# EAGLE board RFM2Pi_v2.7 (EAGLE 7.0.0)
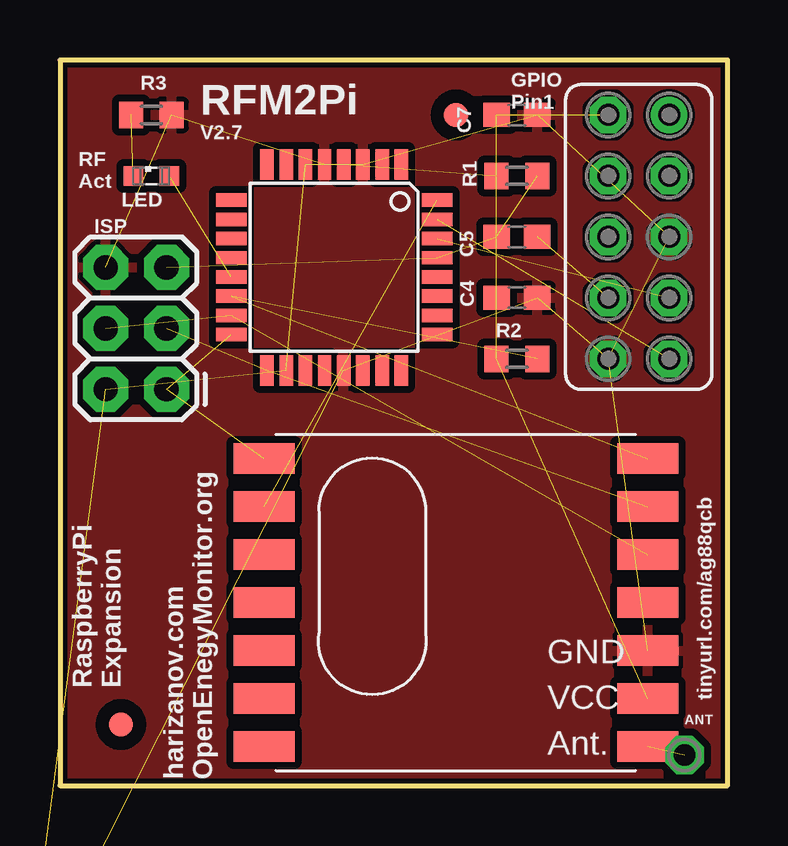
[diagram p0: board, top side]
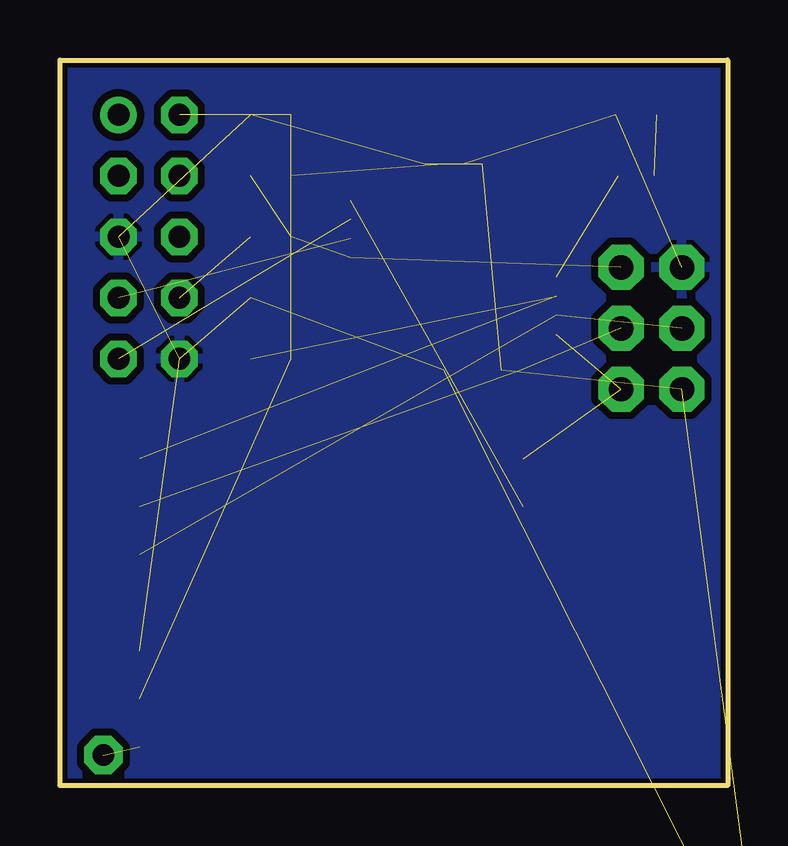
[diagram p1: board, bottom side, seen from below]

Size 27.84 x 30.23 mm. Coordinates in mm from the lower left corner, seen from the top.
Outline: 0,30.23 0,0 27.84,0 27.84,30.23 0,30.23
Copper layers (1*16): Top 0.035mm / dielectric 1.5mm / Bottom 0.035mm
Design rules "default": minimum track width 8mil, minimum drill 0.6mm, track to track 8mil, track to pad 8mil, pad to pad 8mil, via to via 8mil, smd to smd 8mil, copper to edge 8mil, drill to drill 8mil, minimum pad ring 12mil, minimum via ring 8mil, stop-mask expansion 4mil, vias tented up to drill 0mil, thermal gap 8mil
Net classes: 0 default: width 0.254 mm, drill 0.254 mm, clearance 0.254 mm; 1 power: width 0.305 mm, drill 0.305 mm, clearance 0.305 mm

## Footprints (pad centres in the part's own frame; a part is rotated, then mirrored left to right if it is on the bottom)
1,6/0,8 = drill 0.9 pad 1.6 octagon: 1 0,0
C0603 = smd 1.1 x 1: 1 -0.85,0; 2 0.85,0
2X3 = drill 1.016 pad 1.88 octagon: 1 0,0; 2 0,2.54; 3 2.54,0; 4 2.54,2.54; 5 5.08,0; 6 5.08,2.54
SML0603 = smd 0.8 x 0.8: A 0.75,0; C -0.75,0
R0603 = smd 1 x 1.1: 1 -0.85,0; 2 0.85,0
FE05-2 = drill 0.914: 1 -5.08,1.27 | drill 0.914 octagon: 2 -5.08,-1.27; 3 -2.54,1.27; 4 -2.54,-1.27; 5 0,1.27; 6 0,-1.27; 7 2.54,1.27; 8 2.54,-1.27; 9 5.08,1.27; 10 5.08,-1.27
RFM12B = smd 2.54 x 1.27: ANT 8,-6; FFS -8,2; GND 8,-2; IRQ -8,4; P$8 -8,0; P$9 -8,-2; P$10 -8,-4; P$12 -8,-6; P$16 8,0; SCK 8,4; SDI 8,2; SDO -8,6; SEL 8,6; VDD 8,-4
TQFP32-08 = smd 1.27 x 0.559: 1 -4.293,2.8; 2 -4.293,2; 3 -4.293,1.2; 4 -4.293,0.4; 5 -4.293,-0.4; 6 -4.293,-1.2; 7 -4.293,-2; 8 -4.293,-2.8; 17 4.293,-2.8; 18 4.293,-2; 19 4.293,-1.2; 20 4.293,-0.4; 21 4.293,0.4; 22 4.293,1.2; 23 4.293,2; 24 4.293,2.8 | smd 0.559 x 1.27: 9 -2.8,-4.293; 10 -2,-4.293; 11 -1.2,-4.293; 12 -0.4,-4.293; 13 0.4,-4.293; 14 1.2,-4.293; 15 2,-4.293; 16 2.8,-4.293; 25 2.8,4.293; 26 2,4.293; 27 1.2,4.293; 28 0.4,4.293; 29 -0.4,4.293; 30 -1.2,4.293; 31 -2,4.293; 32 -2.8,4.293
FIDUCIAL_1MM = smd 1 x 1: 1 0,0

## Placement (x,y rotation side)
ANT  [1,6/0,8]  26.04,1.27 0 top
C1  0.1uF  [C0603]  0,-4.45 0 top  (outside the outline)
C4  0.1uF  [C0603]  19.05,20.32 0 top
C5  0.1uF  [C0603]  19.05,22.86 180 top
C7  0.1uF  [C0603]  19.05,27.94 0 top
ISP  AVR_SPI_PRG_6PTH  [2X3]  4.45,16.51 90 top
LED  [SML0603]  3.81,25.4 0 top
R1  10K  [R0603]  19.05,25.4 180 top
R2  100K  [R0603]  19.05,17.78 0 top
R3  220R  [R0603]  3.81,27.94 180 top
RASPBERRY_PI  [FE05-2]  24.13,22.86 270 top
RFM12B  RFM12B  [RFM12B]  16.51,7.62 0 top
U2  ATMEGA168  [TQFP32-08]  11.43,21.59 270 top
U$1  FIDUCIAL  [FIDUCIAL_1MM]  16.51,27.94 0 top
U$2  FIDUCIAL  [FIDUCIAL_1MM]  2.54,2.54 0 top

## Library data of the parts
ANT RFM12B = JeeLabs
C1 C4 C5 = rcl
C7 = resistor
ISP U2 = SparkFun
LED = led
R1-R3 U$1 U$2 = adafruit
RASPBERRY_PI = con-lsta; OC_FARNELL: unknown; OC_NEWARK: unknown

## Nets
+3V3 [power]: C1.1 C4.1 C7.1 ISP.2 R1.2 R2.1 RASPBERRY_PI.2 RFM12B.VDD U2.4 U2.6 U2.18
_RESET: C5.1 RASPBERRY_PI.8
A0: U2.23
A1: U2.24
A2: U2.25
A3: U2.26
A4/SDA: U2.27
A5/SCL: U2.28
A6: U2.19
A7: U2.22
D0/RX: RASPBERRY_PI.7 U2.30
D1/TX: RASPBERRY_PI.9 U2.31
D2: RFM12B.IRQ U2.32
D3: U2.1
D4: U2.2
D5: U2.9
D6: U2.10
D7: U2.11
D8: U2.12
D9: LED.A U2.13
D10: R2.2 RFM12B.SEL U2.14
D11/MOSI: ISP.4 RFM12B.SDI U2.15
D12/MISO: ISP.1 RFM12B.SDO U2.16
D13/SCK: ISP.3 RFM12B.SCK U2.17
GND [power]: C1.2 C4.2 C7.2 ISP.6 R3.1 RASPBERRY_PI.5 RASPBERRY_PI.10 RFM12B.GND U2.3 U2.5 U2.21
N$3: LED.C R3.2
N$6 [power]: ANT.1 RFM12B.ANT
RESET: C5.2 ISP.5 R1.1 U2.29

## Tracks (layer width: path | path; a pad name or v marks a point on that pad's centre or on a via)
+3V3  (10 unrouted)
_RESET  (1 unrouted)
D0/RX  (1 unrouted)
D1/TX  (1 unrouted)
D2  (1 unrouted)
D9  (1 unrouted)
D10  (2 unrouted)
D11/MOSI  (2 unrouted)
D12/MISO  (2 unrouted)
D13/SCK  (2 unrouted)
GND  (10 unrouted)
  pour Top (isolate 0): -1.14,31.75 -1.4,31.75 -1.4,-1.52 29.34,-1.52 29.34,31.62 -1.27,31.62
  pour Bottom (isolate 0): -0.51,31.5 28.83,31.5 28.83,-0.64 -0.51,-0.64
N$3  (1 unrouted)
N$6  (1 unrouted)
RESET  (3 unrouted)

## Text on the board
_tsilk: RFM2Pi | GPIO / Pin1 | V2.7 | RF / Act | RaspberryPi / Expansion | tinyurl.com/ag88qcb | harizanov.com / OpenEnegyMonitor.org